# EAGLE board Schematic_rev1 (EAGLE 9.3.1)
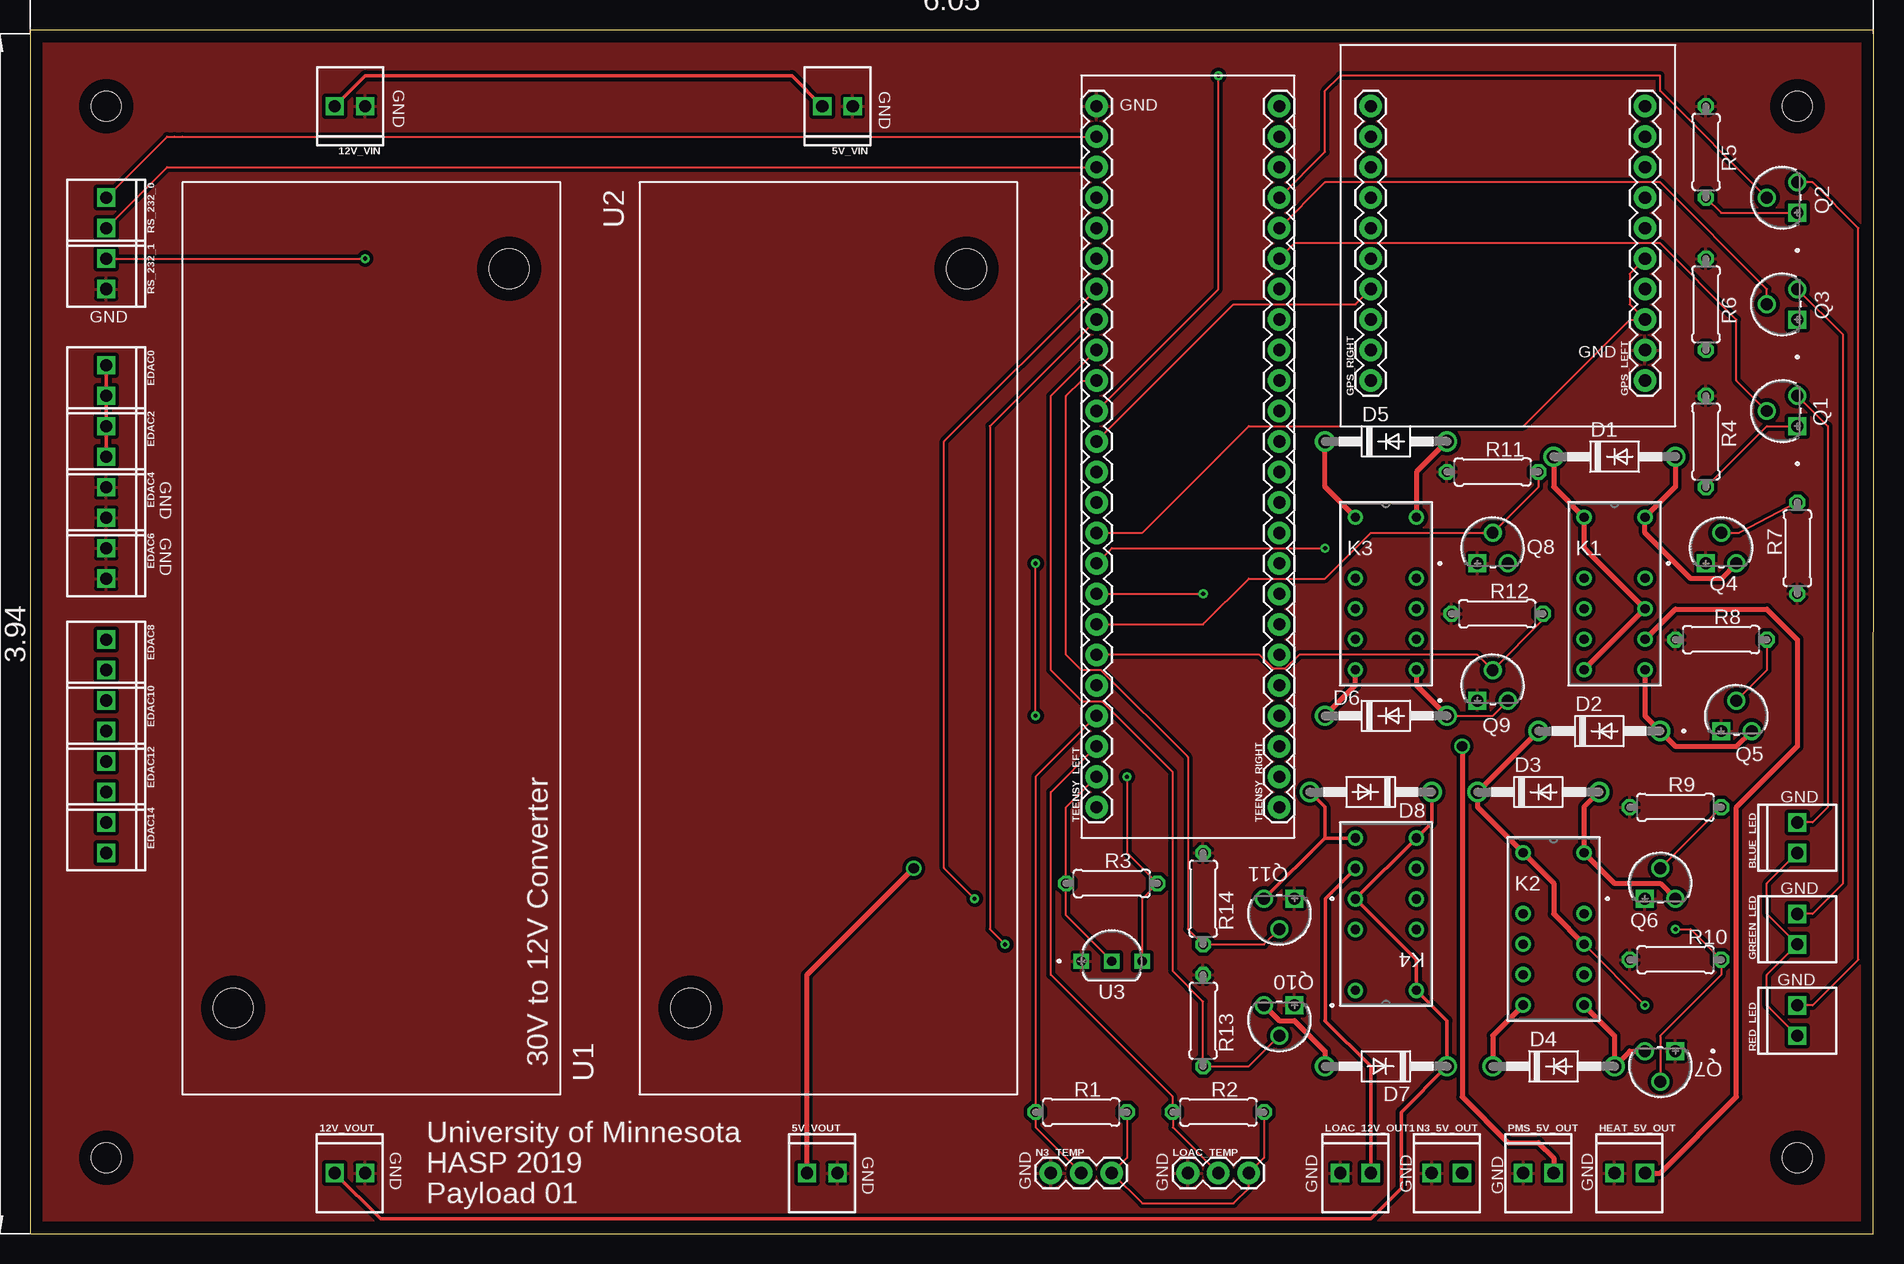
[diagram p0: board, top side]
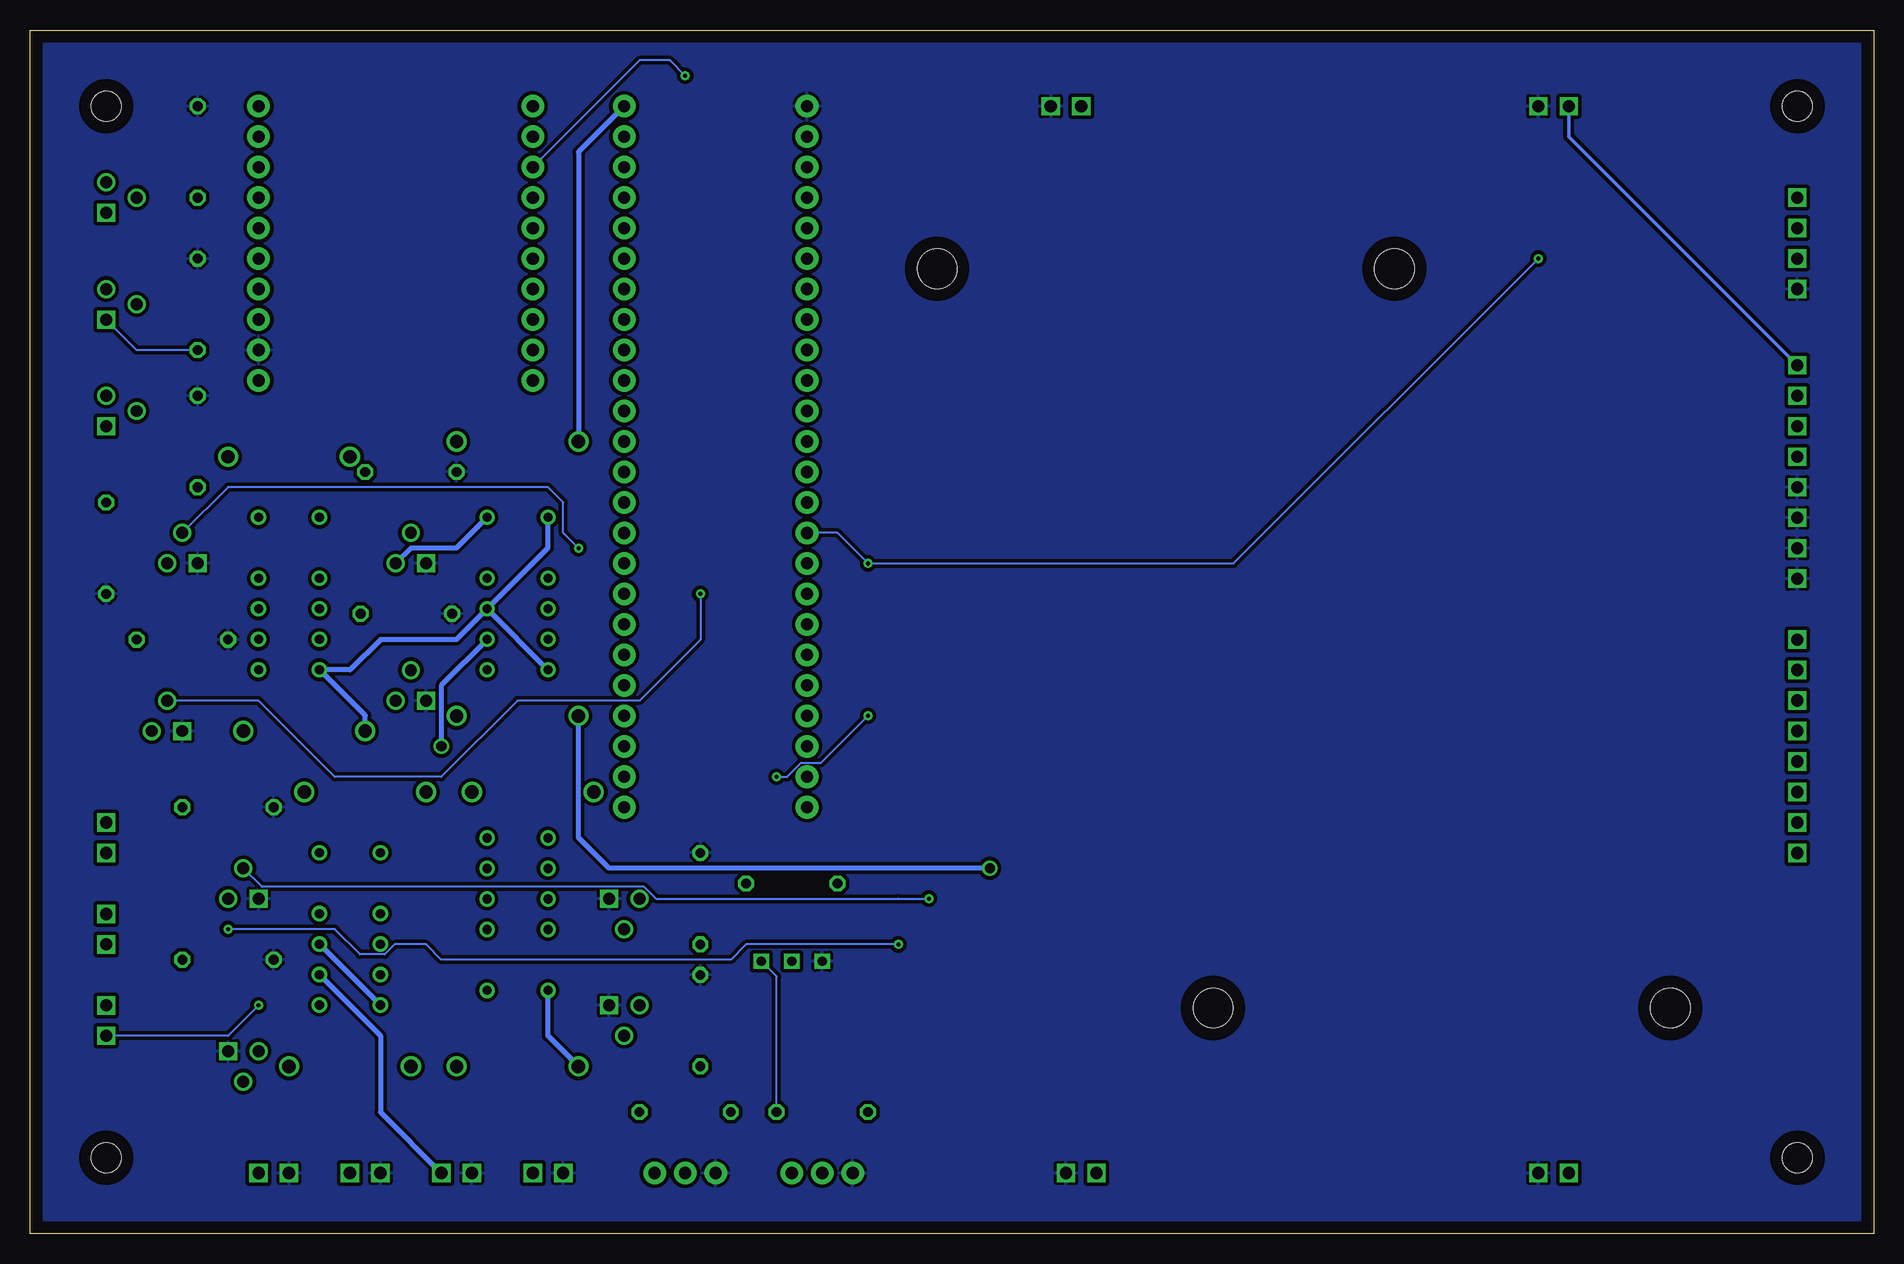
[diagram p1: board, bottom side, seen from below]

Size 153.67 x 100.33 mm. Coordinates in mm from the lower left corner, seen from the top.
Outline: 0,0 153.65,0 153.67,100.33 0,100.33 0,0
Copper layers (1*16): Top 0.035mm / dielectric 1.5mm / Bottom 0.035mm
Design rules "default": minimum track width 6mil, minimum drill 0.35mm, track to track 6mil, track to pad 6mil, pad to pad 6mil, via to via 6mil, smd to smd 6mil, copper to edge 40mil, drill to drill 6mil, minimum pad ring 10mil, minimum via ring 8mil, stop-mask expansion 4mil, vias tented up to drill 0mil, thermal gap 10mil
Holes 3.3 mm at 39.95,80.43 16.95,18.83 55.05,18.83 78.05,80.43
Holes 2.5 mm at 6.35,93.98 6.35,6.35 147.32,6.35 147.32,93.98

## Footprints (pad centres in the part's own frame; a part is rotated, then mirrored left to right if it is on the bottom)
1X02_2.54_SCREWTERM = drill 1.016 square: P1 2.54,0; P2 0,0
DO41-10 = drill 1.118: A 5.08,0; C -5.08,0
1X10 = drill 1.016 pad 1.88: 1 0,0; 2 2.54,0; 3 5.08,0; 4 7.62,0; 5 10.16,0; 6 12.7,0; 7 15.24,0; 8 17.78,0; 9 20.32,0; 10 22.86,0
EC2TNU = drill 0.762 pad 1.27: 1 -2.54,6.375; 3 -2.54,1.295; 4 -2.54,-1.245; 5 -2.54,-3.785; 6 -2.54,-6.325; 7 2.54,-6.325; 8 2.54,-3.785; 9 2.54,-1.245; 10 2.54,1.295; 12 2.54,6.375
1X03 = drill 1.016 pad 1.88: 1 0,0; 2 2.54,0; 3 5.08,0
TO-92 = drill 0.991 pad 1.499 square: 1 -2.54,-2.54 | drill 0.991 pad 1.499: 2 -1.27,0; 3 0,-2.54
0207/7 = drill 0.813 octagon: 1 -3.81,0; 2 3.81,0
1X24 = drill 1.016 pad 1.88: 2 -26.67,0; 3 -24.13,0; 4 -21.59,0; 5 -19.05,0; 6 -16.51,0; 7 -13.97,0; 8 -11.43,0; 9 -8.89,0; 10 -6.35,0; 11 -3.81,0; 12 -1.27,0; 13 1.27,0; 14 3.81,0; 15 6.35,0; 16 8.89,0; 17 11.43,0; 18 13.97,0; 19 16.51,0; 20 19.05,0; 21 21.59,0; 22 24.13,0; 23 26.67,0; 24 29.21,0; 25 31.75,0
21-0248A = drill 0.762 pad 1.27 square: 1 -5.08,0; 2 -2.54,0; 3 0,0

## Placement (x,y rotation side)
5V_VIN  [1X02_2.54_SCREWTERM]  68.58,93.98 180 top
5V_VOUT  [1X02_2.54_SCREWTERM]  64.77,5.08 0 top
12V_VIN  [1X02_2.54_SCREWTERM]  27.94,93.98 180 top
12V_VOUT  [1X02_2.54_SCREWTERM]  25.4,5.08 0 top
BLUE_LED  [1X02_2.54_SCREWTERM]  147.32,31.75 90 top
D1  1N4004  [DO41-10]  132.08,64.77 0 top
D2  1N4004  [DO41-10]  130.81,41.91 0 top
D3  1N4004  [DO41-10]  125.73,36.83 0 top
D4  1N4004  [DO41-10]  127,13.97 0 top
D5  1N4004  [DO41-10]  113.03,66.04 0 top
D6  1N4004  [DO41-10]  113.03,43.18 0 top
D7  1N4004  [DO41-10]  113.03,13.97 180 top
D8  1N4004  [DO41-10]  111.76,36.83 180 top
EDAC0  [1X02_2.54_SCREWTERM]  6.35,72.39 270 top
EDAC2  [1X02_2.54_SCREWTERM]  6.35,67.31 270 top
EDAC4  [1X02_2.54_SCREWTERM]  6.35,62.23 270 top
EDAC6  [1X02_2.54_SCREWTERM]  6.35,57.15 270 top
EDAC8  [1X02_2.54_SCREWTERM]  6.35,49.53 270 top
EDAC10  [1X02_2.54_SCREWTERM]  6.35,44.45 270 top
EDAC12  [1X02_2.54_SCREWTERM]  6.35,39.37 270 top
EDAC14  [1X02_2.54_SCREWTERM]  6.35,34.29 270 top
GPS_LEFT  [1X10]  134.62,71.12 90 top
GPS_RIGHT  [1X10]  111.76,71.12 90 top
GREEN_LED  [1X02_2.54_SCREWTERM]  147.32,24.13 90 top
HEAT_5V_OUT  [1X02_2.54_SCREWTERM]  132.08,5.08 0 top
K1  EC2-5TNU  [EC2TNU]  132.08,53.34 0 top
K2  EC2-5TNU  [EC2TNU]  127,25.4 0 top
K3  EC2-5TNU  [EC2TNU]  113.03,53.34 0 top
K4  EC2-5TNU  [EC2TNU]  113.03,26.67 180 top
LOAC_12V_OUT1  [1X02_2.54_SCREWTERM]  109.22,5.08 0 top
LOAC_TEMP  [1X03]  96.52,5.08 0 top
N3_5V_OUT  [1X02_2.54_SCREWTERM]  116.84,5.08 0 top
N3_TEMP  [1X03]  85.09,5.08 0 top
PMS_5V_OUT  [1X02_2.54_SCREWTERM]  124.46,5.08 0 top
Q1  2N7000  [TO-92]  144.78,69.85 90 top
Q2  2N7000  [TO-92]  144.78,87.63 90 top
Q3  2N7000  [TO-92]  144.78,78.74 90 top
Q4  2N7000  [TO-92]  142.24,58.42 0 top
Q5  2N7000  [TO-92]  143.51,44.45 0 top
Q6  2N7000  [TO-92]  137.16,30.48 0 top
Q7  2N7000  [TO-92]  134.62,12.7 180 top
Q8  2N7000  [TO-92]  123.19,58.42 0 top
Q9  2N7000  [TO-92]  123.19,46.99 0 top
Q10  2N7000  [TO-92]  102.87,16.51 180 top
Q11  2N7000  [TO-92]  102.87,25.4 180 top
R1  4.7k  [0207/7]  87.63,10.16 0 top
R2  4.7k  [0207/7]  99.06,10.16 0 top
R3  4.7k  [0207/7]  90.17,29.21 0 top
R4  50  [0207/7]  139.7,66.04 270 top
R5  80  [0207/7]  139.7,90.17 270 top
R6  80  [0207/7]  139.7,77.47 270 top
R7  10k  [0207/7]  147.32,57.15 90 top
R8  10k  [0207/7]  140.97,49.53 0 top
R9  10k  [0207/7]  137.16,35.56 0 top
R10  10k  [0207/7]  137.16,22.86 0 top
R11  10k  [0207/7]  121.92,63.5 0 top
R12  10k  [0207/7]  122.3,51.69 0 top
R13  10k  [0207/7]  97.79,17.78 270 top
R14  10k  [0207/7]  97.79,27.94 270 top
RED_LED  [1X02_2.54_SCREWTERM]  147.32,16.51 90 top
RS_232_0  [1X02_2.54_SCREWTERM]  6.35,86.36 270 top
RS_232_1  [1X02_2.54_SCREWTERM]  6.35,81.28 270 top
TEENSY_LEFT  [1X24]  88.9,62.23 90 top
TEENSY_RIGHT  [1X24]  104.14,62.23 90 top
U3  DS18B20+  [21-0248A]  92.71,22.73 0 top

## Library data of the parts
5V_VIN 5V_VOUT 12V_VIN 12V_VOUT BLUE_LED EDAC0 EDAC2 EDAC4 EDAC6 EDAC8 EDAC10 EDAC12 EDAC14 GREEN_LED HEAT_5V_OUT LOAC_12V_OUT1 LOAC_TEMP N3_5V_OUT N3_TEMP PMS_5V_OUT RED_LED RS_232_0 RS_232_1 TEENSY_LEFT TEENSY_RIGHT = SparkFun-Connectors
D1-D8 = diode
GPS_LEFT GPS_RIGHT = SparkFun-Connectors; PROD_ID: CONN-11563
K1-K4 = EC2-5TNU; MANUFACTURER_PART_NUMBER: EC25TNU; VENDOR: KEMET
Q1-Q11 = hollx047_3; MANUFACTURER_PART_NUMBER: 2N7000; VENDOR: STMicroelectronics
R1-R14 = resistor
U3 = Maxim DS18B20+; MANUFACTURER_PART_NUMBER: DS18B20+; VENDOR: Maxim Integrated Products

## Nets
3V3DC: GPS_LEFT.3 GPS_LEFT.5 LOAC_TEMP.3 N3_TEMP.3 R1.2 R2.2 R3.2 RS_232_1.P2 TEENSY_LEFT.11 U3.3
5VDC: 5V_VOUT.P2 BLUE_LED.P2 D1.C D2.C D3.C D4.C D5.C D6.C GREEN_LED.P2 K1.1 K1.6 K1.9 K2.1 K2.6 K2.9 K3.1 K3.6 K3.9 RED_LED.P2 TEENSY_RIGHT.25
12VDC: 12V_VOUT.P2 D7.C D8.C K4.1 K4.6 K4.9
AMB_TEMP: R3.1 TEENSY_LEFT.3 U3.2
BLUE_ACTION: Q1.2 TEENSY_RIGHT.20
GND: 5V_VIN.P2 5V_VOUT.P1 12V_VIN.P2 12V_VOUT.P1 EDAC4.P1 EDAC4.P2 EDAC6.P1 EDAC6.P2 GPS_LEFT.2 HEAT_5V_OUT.P2 LOAC_12V_OUT1.P2 LOAC_TEMP.1 N3_5V_OUT.P2 N3_TEMP.1 PMS_5V_OUT.P2 Q4.1 Q5.1 Q6.1 Q7.1 Q8.1 Q9.1 Q10.1 Q11.1 R4.1 R5.1 R6.1 R7.1 R8.1 R9.1 R10.1 R11.1 R12.1 R13.1 R14.1 RS_232_1.P1 TEENSY_LEFT.25 U3.1
GPS_RX: GPS_RIGHT.4 TEENSY_LEFT.14
GPS_TX: GPS_RIGHT.8 TEENSY_LEFT.15
GREEN_FIX: Q3.2 TEENSY_RIGHT.21
HASP_RX_DB9_3: RS_232_0.P2 TEENSY_LEFT.24
HASP_TX_DB9_2: RS_232_0.P1 TEENSY_LEFT.23
HASP_VIN: 5V_VIN.P1 12V_VIN.P1 EDAC0.P1 EDAC0.P2 EDAC2.P1 EDAC2.P2
HEAT_RESET: Q5.2 R8.2 TEENSY_LEFT.9
HEAT_SET: Q4.2 R7.2 TEENSY_LEFT.10
LOAC_RESET: Q11.2 R14.2 TEENSY_LEFT.16
LOAC_SET: Q10.2 R13.2 TEENSY_LEFT.17
LOAC_TEMP: LOAC_TEMP.2 R2.1 TEENSY_LEFT.4
N3_RESET: Q7.2 R10.2 TEENSY_LEFT.18
N3_SET: Q6.2 R9.2 TEENSY_LEFT.19
N3_TEMP: N3_TEMP.2 R1.1 TEENSY_LEFT.5
N$1: BLUE_LED.P1 Q1.3
N$2: Q1.1 R4.2
N$3: D2.A K1.7 Q5.3
N$4: Q2.3 RED_LED.P1
N$5: Q2.1 R5.2
N$6: Q3.1 R6.2
N$7: GREEN_LED.P1 Q3.3
N$8: D4.A K2.7 Q7.3
N$9: D3.A K2.12 Q6.3
N$10: D1.A K1.12 Q4.3
N$11: K2.8 N3_5V_OUT.P1
N$12: D6.A K3.7 Q9.3
N$13: HEAT_5V_OUT.P1 K1.8
N$14: D5.A K3.12 Q8.3
N$15: K3.8 PMS_5V_OUT.P1
N$16: D8.A K4.7 Q11.3
N$17: D7.A K4.12 Q10.3
N$18: K4.8 LOAC_12V_OUT1.P1
PMS_RESET: Q9.2 R12.2 TEENSY_LEFT.7
PMS_SET: Q8.2 R11.2 TEENSY_LEFT.8
RED_LOGGING: Q2.2 TEENSY_RIGHT.22

## Tracks (layer width: path | path; a pad name or v marks a point on that pad's centre or on a via)
3V3DC  (via drill 0.35)
  Top 0.152: v83.82,43.18 v83.82,55.88 | TEENSY_LEFT.11 92.71,58.42 101.6,67.31 124.46,67.31 133.35,76.2 GPS_LEFT.3 133.35,77.47 133.35,80.01 GPS_LEFT.5 | R1.2 91.44,6.35 N3_TEMP.3 92.71,2.54 100.33,2.54 101.6,3.81 LOAC_TEMP.3 102.87,6.35 R2.2 | v91.44,38.1 91.44,31.75 R3.2 92.71,27.94 U3.3 | RS_232_1.P2 v27.94,81.28
  Bottom 0.152: v91.44,38.1 90.55,38.1 89.38,39.27 87.73,39.27 v83.82,43.18 | TEENSY_LEFT.11 86.36,58.42 v83.82,55.88 53.34,55.88 v27.94,81.28 | R1.2 91.44,21.46 U3.3
5VDC  (via drill 0.35, 0.85)
  Top 0.152: K2.6 124.51,19.07 | RED_LED.P2 144.78,19.05 144.78,21.59 GREEN_LED.P2 144.78,26.67 144.78,29.21 BLUE_LED.P2 | K2.9 129.55,24.14 134.62,19.07 v134.62,19.05
  Top 0.406: 5V_VOUT.P2 64.77,21.59 v73.66,30.48 | D6.C 110.49,45.72 K3.6 | K3.1 107.95,62.26 D5.C | D2.C D3.C 120.65,35.59 K2.1 127,29.23 127,26.67 129.53,24.14 129.55,24.14 | K2.6 121.92,16.54 D4.C | K1.6 K1.9 129.54,57.17 K1.1 127,62.26 D1.C
  Bottom 0.152: v134.62,19.05 137.16,16.51 RED_LED.P2 | K3.9 115.58,52.08
  Bottom 0.406: v73.66,30.48 105.41,30.48 107.95,33.02 D6.C | K3.6 110.52,47.02 115.58,52.08 | K3.1 110.49,57.17 K3.9 118.14,49.53 124.46,49.53 126.99,47 129.53,47 | TEENSY_RIGHT.25 107.95,90.17 D5.C | D2.C 125.73,43.2 129.53,47 | 129.53,47 K1.6 | K2.6 K2.9
12VDC
  Top 0.152: K4.1 115.57,20.32
  Top 0.305: 12V_VOUT.P2 29.21,1.27 111.76,1.27 114.3,3.81 114.3,10.16 D7.C 118.11,17.78 115.57,20.32 115.57,22.84 K4.9 K4.6 116.84,34.27 D8.C
AMB_TEMP
  Top 0.152: U3.2 86.36,26.54 R3.1 86.36,35.56 TEENSY_LEFT.3
BLUE_ACTION
  Top 0.152: TEENSY_RIGHT.20 105.41,82.55 135.89,82.55 142.24,76.2 142.24,71.12 Q1.2
GND
  pour Bottom (isolate 0.305): 0,100.33 153.67,100.33 153.67,0 0,0
  pour Top (isolate 0.305): 0,100.33 153.67,100.33 153.67,0 0,0
GPS_RX
  Top 0.152: TEENSY_LEFT.14 100.33,77.47 110.49,77.47 GPS_RIGHT.4
GPS_TX  (via drill 0.35)
  Top 0.152: TEENSY_LEFT.15 99.06,78.74 v99.06,96.52
  Bottom 0.152: v99.06,96.52 100.33,97.79 102.87,97.79 GPS_RIGHT.8
GREEN_FIX
  Top 0.152: TEENSY_RIGHT.21 107.95,87.63 135.89,87.63 144.78,78.74 Q3.2
HASP_RX_DB9_3
  Top 0.152: TEENSY_LEFT.24 12.7,91.44 12.05,91.44 11.43,91.44 RS_232_0.P2
HASP_TX_DB9_2
  Top 0.152: RS_232_0.P1 11.43,88.9 TEENSY_LEFT.23
HASP_VIN
  Top 0.305: EDAC2.P1 EDAC2.P2 EDAC0.P1 EDAC0.P2 | 12V_VIN.P1 27.94,96.52 63.5,96.52 5V_VIN.P1
  Bottom 0.305: EDAC0.P2 25.4,91.44 12V_VIN.P1
HEAT_RESET  (via drill 0.35)
  Top 0.152: TEENSY_LEFT.9 v97.79,53.34 | Q5.2 144.78,46.99 R8.2
  Bottom 0.152: v97.79,53.34 97.79,49.53 102.87,44.45 113.03,44.45 119.38,38.1 128.27,38.1 134.62,44.45 Q5.2
HEAT_SET  (via drill 0.35)
  Top 0.152: R7.2 142.47,58.42 Q4.2 | TEENSY_LEFT.10 90.17,57.15 v107.95,57.15
  Bottom 0.152: v107.95,57.15 109.22,58.42 109.22,60.96 110.49,62.23 137.16,62.23 Q4.2
LOAC_RESET
  Top 0.152: TEENSY_LEFT.16 87.63,71.12 86.36,69.85 86.36,48.26 87.63,46.99 89.28,46.99 96.52,39.75 96.52,25.4 R14.2 102.87,24.13 Q11.2
LOAC_SET
  Top 0.152: TEENSY_LEFT.17 85.09,69.85 85.09,46.99 87.73,44.35 89.38,44.35 95.25,38.48 95.25,21.91 97.79,19.37 R13.2 101.6,13.97 Q10.2
LOAC_TEMP
  Top 0.152: LOAC_TEMP.2 95.25,8.89 R2.1 95.25,11.43 85.09,21.59 85.09,36.83 TEENSY_LEFT.4
N3_RESET  (via drill 0.35)
  Top 0.152: TEENSY_LEFT.18 80.01,67.31 80.01,25.4 v81.28,24.13 | v137.16,25.4 138.43,25.4 R10.2 140.97,21.59 135.89,16.51 Q7.2
  Bottom 0.152: v137.16,25.4 128.27,25.4 126.16,23.29 124.1,23.29 123.26,24.13 120.65,24.13 119.38,22.86 95.25,22.86 93.98,24.13 v81.28,24.13
N3_SET  (via drill 0.35)
  Top 0.152: R9.2 Q6.2 | v78.74,27.94 76.2,30.48 76.2,66.04 TEENSY_LEFT.19
  Bottom 0.152: Q6.2 134.33,28.92 102.47,28.92 101.49,27.94 81.28,27.94 v78.74,27.94
N3_TEMP
  Top 0.152: N3_TEMP.2 83.82,8.89 R1.1 83.82,38.1 TEENSY_LEFT.5
N$1
  Top 0.152: BLUE_LED.P1 148.59,34.29 149.86,35.56 149.86,67.31 Q1.3
N$2
  Top 0.152: R4.2 144.78,67.31 Q1.1
N$3
  Top 0.406: K1.7 134.62,43.18 D2.A 137.16,40.64 142.24,40.64 Q5.3
N$4
  Top 0.152: RED_LED.P1 148.59,19.05 152.4,22.86 152.4,83.82 148.59,87.63 Q2.3
N$5
  Top 0.152: R5.2 140.97,85.09 Q2.1
N$6
  Bottom 0.152: R6.2 144.78,73.66 Q3.1
N$7
  Top 0.152: GREEN_LED.P1 148.59,26.67 151.13,29.21 151.13,74.93 Q3.3
N$8
  Top 0.406: K2.7 132.08,16.54 D4.A 133.35,15.24 Q7.3
N$9
  Top 0.406: D3.A 129.54,35.56 K2.12 129.54,31.75 132.08,29.21 135.89,29.21 Q6.3
N$10
  Top 0.406: D1.A 137.16,62.26 K1.12 134.62,58.42 138.43,54.61 140.97,54.61 Q4.3
N$11
  Bottom 0.406: K2.8 124.46,16.54 124.46,10.16 N3_5V_OUT.P1
N$12
  Top 0.152: D6.A 121.92,43.18 Q9.3
  Top 0.406: K3.7 115.57,45.72 D6.A
N$13
  Top 0.406: HEAT_5V_OUT.P1 135.89,5.08 142.24,11.43 142.24,35.56 147.32,40.64 147.32,49.53 144.78,52.07 137.16,52.07 134.64,49.55 K1.8
N$14
  Top 0.406: D5.A 115.57,63.5 K3.12
  Bottom 0.406: K3.12 118.14,57.15 121.92,57.15 Q8.3
N$15  (via drill 0.85)
  Top 0.406: v119.38,40.64 119.38,11.43 123.19,7.62 125.73,7.62 127,6.35 PMS_5V_OUT.P1
  Bottom 0.406: K3.8 115.57,49.53 119.38,45.72 v119.38,40.64
N$16
  Top 0.152: D8.A 106.68,36.8
  Top 0.305: Q11.3 107.93,32.99 | 107.93,32.99 K4.7 | D8.A 107.93,35.59 107.93,32.99
N$17
  Top 0.406: Q10.3 104.14,17.78 105.41,17.78 107.95,15.24 D7.A
  Bottom 0.406: D7.A 110.49,16.51 K4.12
N$18
  Top 0.152: 107.96,27.93 107.95,27.91
  Top 0.305: K4.8 107.96,27.93 107.96,17.79 107.95,17.78 111.76,13.97 LOAC_12V_OUT1.P1
PMS_RESET
  Top 0.152: TEENSY_LEFT.7 102.49,48.26 103.66,47.09 104.62,47.09 105.79,48.26 120.65,48.26 Q9.2 126.11,51.18 R12.2
PMS_SET
  Top 0.152: TEENSY_LEFT.8 97.79,50.8 101.6,54.61 107.95,54.61 111.76,58.42 Q8.2 125.73,62.23 R11.2
RED_LOGGING
  Top 0.152: TEENSY_RIGHT.22 107.95,90.17 107.95,95.25 109.22,96.52 135.89,96.52 135.89,95.25 Q2.2

## Text on the board
tPlace: GND | GND | GND | U2 | GND | GND | GND | GND | GND | GND | GND | 30V to 12V Converter | U1 | University of Minnesota | GND | GND | HASP 2019 | GND | GND | GND | Payload 01 | GND | GND | GND
routoute: 30V to 5V Converter